# Altium PCB ESP-WROOM32.PcbDoc (part 1 of 2)
Units mil, origin at the board's own origin, x right, y up, seen from the top; angles counter-clockwise.
Board outline 3370 x 1400 mil, 2 copper layers (L1, L2); 42 components, 54 nets, 176 pads, 101 vias.
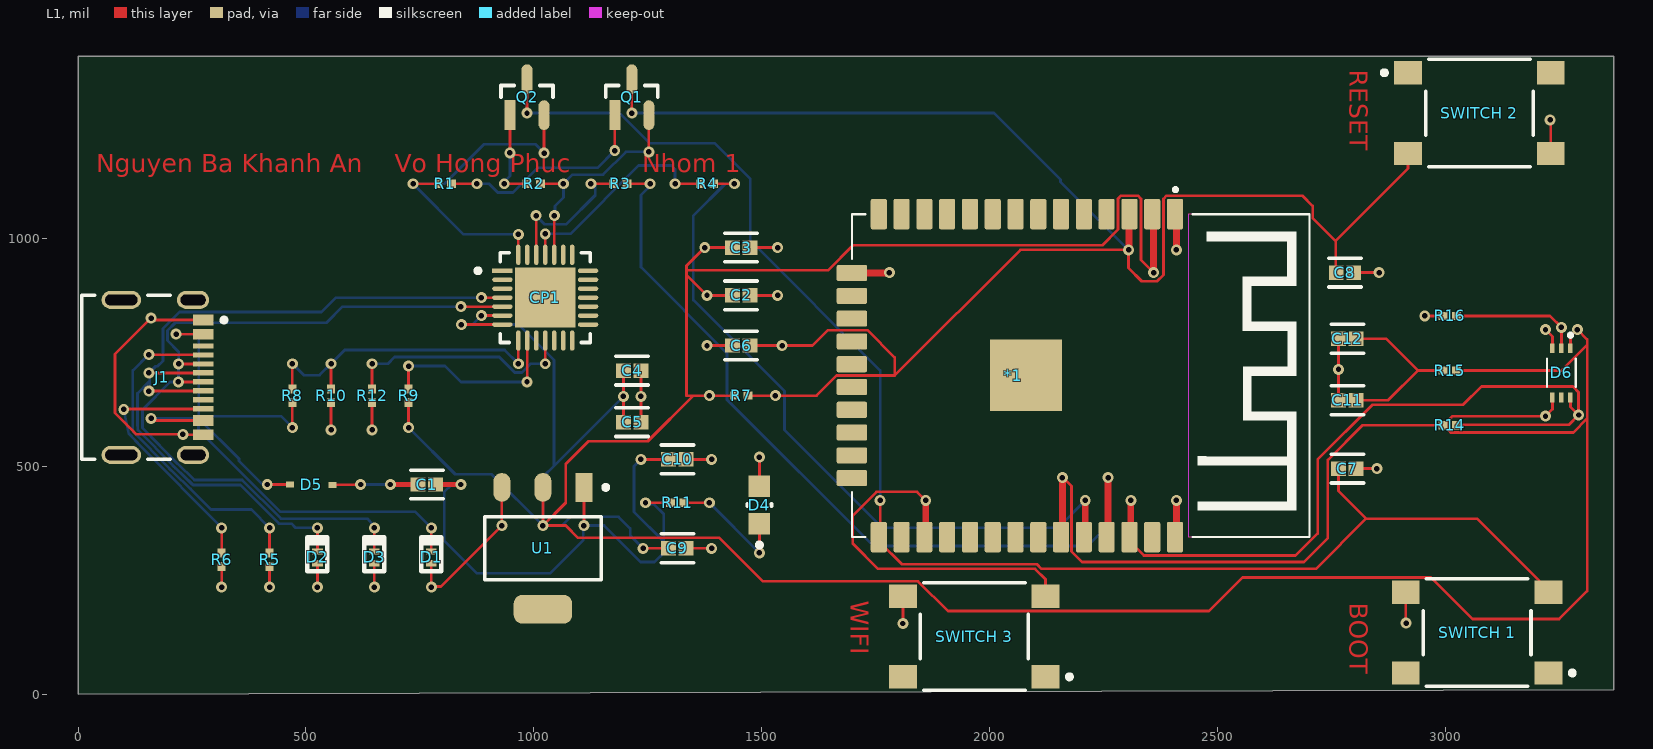
[diagram p0: L1 view]
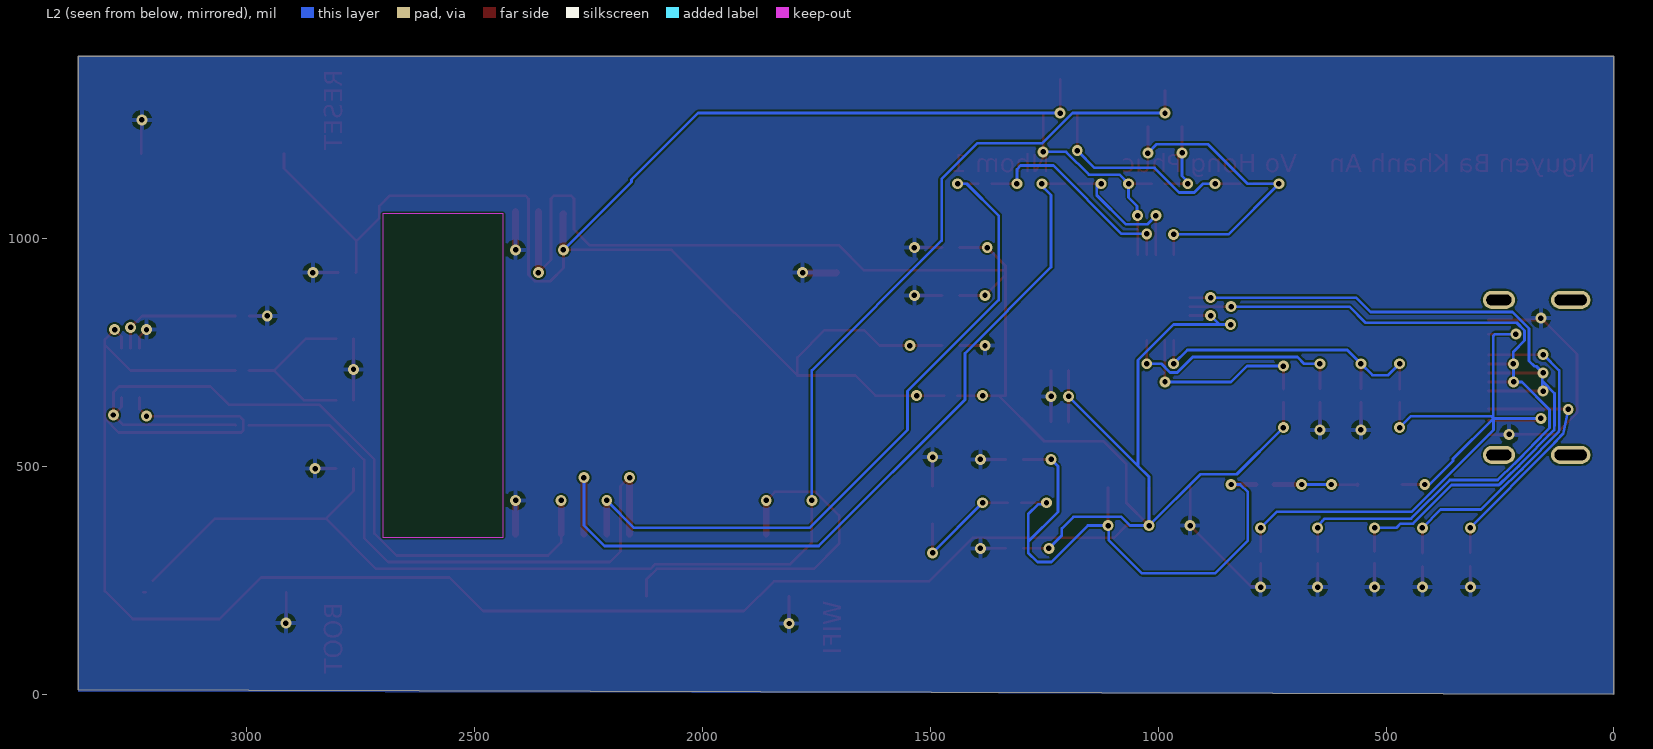
[diagram p1: L2 view, seen from below]
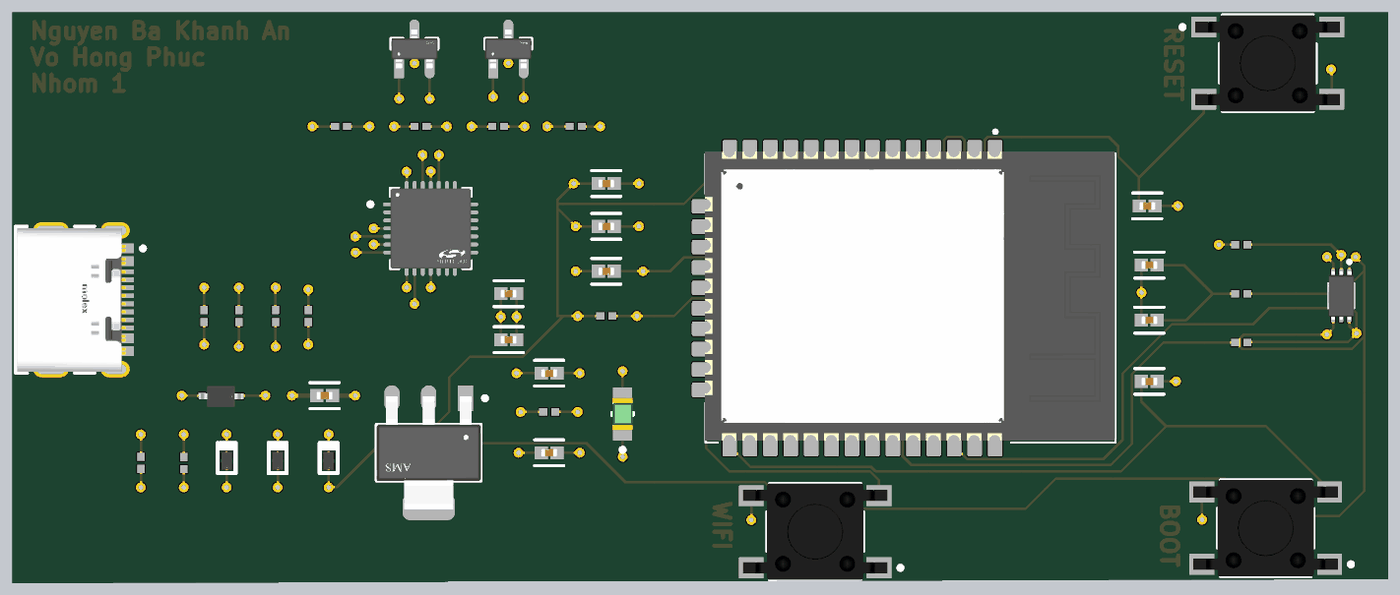
[diagram p2: 3D render of the assembled board from above, using the file's embedded part models]

## Layer stack, top to bottom
Top Solder: solder mask 0.4, Solder Resist, Dk 3.5
L1: signal copper 1.4
Dielectric 1: prepreg 12.6, PP-006, Dk 4.8
L2: signal copper 1.4
Bottom Solder: solder mask 0.4, Solder Resist, Dk 3.5

## Board outline
0,0 0,1400 3370,1400 3370,10

## Design rules (kind name [scope] priority, off if disabled: settings)
Clearance [All] p1: gap=4 ignorepadtopadclearanceinfootprint=FALSE except(2: SMDPad-SMDPad)
MinimumSolderMaskSliver [All] p1: minsoldermaskwidth=3
PlaneConnect [All] p1: planeconnectstyle=Direct reliefexpansion=20 reliefentries=4 reliefconductorwidth=10 reliefairgap=10
PolygonConnect [All] p1: connectstyle=Relief reliefconductorwidth=10 reliefentries=4 polygonreliefangle="90 Angle" airgapwidth=10
RoutingVias [All] p1: holewidth=12 width=24 viastyle="Through Hole" minholewidth=12 minwidth=24 maxholewidth=12 maxwidth=24
SilkToSolderMaskClearance [IsPad] p1: minsilkscreentomaskgap=4 clearancetoexposedcopper=TRUE
SolderMaskExpansion [All] p1: expansion=3 istentingtop=FALSE
SupplyNets "Schematic Supply Nets_4" [InNet('IO21')] p1: voltage=0.000
SupplyNets "Schematic Supply Nets_3" [InNet('GND')] p2: voltage=0.000
SupplyNets "Schematic Supply Nets_2" [InNet('EXT_5V')] p3: voltage=0.000
SupplyNets "Schematic Supply Nets" [InNet('VBUS')] p4: voltage=0.000
Width [All] p1: maxlimit=100 minlimit=6 preferedwidth=6 minimp=50.000000 maximp=50.000000 favimp=50.000000
27 further rules are at their usual default settings.

## Components (designator, comment, footprint, x,y, rotation, side; value= is the part's Value field where it differs from the comment)
*1 "ESP32-WROOM-32E-N4" MODULE_ESP-WROOM-32 2082,699 r270 top
C1 "0.1uF/50V(10%)" FP-GRM158-0_2-IPC_A 765,460 r0 top value=100nF
C2 "0.1uF/50V(10%)" FP-GRM158-0_2-IPC_A 1455,875 r180 top value=100nF
C3 "22uF/10V(20%)" FP-GRM158-0_2-IPC_A 1455,980 r180 top value=22µF
C4 "10uF/10V(20%)" FP-GRM158-0_2-IPC_A 1215.75,710 r180 top value=10µF
C5 "0.1uF/50V(10%)" FP-GRM158-0_2-IPC_A 1215.75,597 r180 top value=100nF
C6 "0.1uF/50V(10%)" FP-GRM158-0_2-IPC_A 1455,765 r0 top value=100nF
C7 "0.1uF/50V(10%)" FP-GRM158-0_2-IPC_A 2785,495 r180 top value=100nF
C8 "0.1uF/50V(10%)" FP-GRM158-0_2-IPC_A 2780,925 r180 top value=100nF
C9 "22uF/10V(20%)" FP-GRM158-0_2-IPC_A 1315,320 r180 top value=22µF
C10 "22uF/10V(20%)" FP-GRM158-0_2-IPC_A 1315,515 r180 top value=22µF
C11 "10uF/10V(20%)" FP-GRM158-0_2-IPC_A 2785,645 r0 top value=10µF
C12 "0.1uF/50V(10%)" FP-GRM158-0_2-IPC_A 2785,780 r0 top value=100nF
CP1 "CP2102N-A02-GQFN28" FP-CP2102N-A02-GQFN28-IPC_A 1025,870 r0 top
D1 "AQ3045-01ETG" PESD5V0U1BA,115 775,300 r270 top
D2 "AQ3045-01ETG" PESD5V0U1BA,115 525,300 r270 top
D3 "AQ3045-01ETG" PESD5V0U1BA,115 650,300 r270 top
D4 "LTST-C170GKT" FP-LTST-C170GKT-MFG 1495,415 r90 top
D5 "BAT760Q-7" BAT760Q-7 510,460 r0 top
D6 "BH1750" XDCR_BH1750FVI-TR 3255,705 r270 top
J1 "USB-C" FP-2171790001-MFG 140,695 r270 top
Q1 "SS8050-G" FP-SS8050-G-IPC_A 1215,1310 r90 top
Q2 "SS8050-G" FP-SS8050-G-IPC_A 985,1310 r90 top
R1 "10K(5%)" RESC1005X40X25LL05T10 805,1120 r0 top value=10kΩ
R2 "10K(5%)" RESC1005X40X25LL05T10 1000,1120 r180 top value=10kΩ
R3 "10K(5%)" RESC1005X40X25LL05T10 1190,1120 r180 top value=10kΩ
R4 "10K(5%)" RESC1005X40X25LL05T10 1380,1120 r180 top value=10kΩ
R5 "5.1K" RESC1005X40X25LL05T10 420,294.76 r90 top value=5.1kΩ
R6 "5.1K" RESC1005X40X25LL05T10 315,295.24 r90 top value=5.1kΩ
R7 "10K(5%)" RESC1005X40X25LL05T10 1455,655 r180 top value=10kΩ
R8 "22.1K(1%)" RESC1005X40X25LL05T10 470,655 r90 top value=22.1kΩ
R9 "2K(5%)" RESC1005X40X25LL05T10 725,655 r90 top value=2kΩ
R10 "47.5K(1%)" RESC1005X40X25LL05T10 555,655 r90 top value=47.5kΩ
R11 "10K(5%)" RESC1005X40X25LL05T10 1315,420 r180 top value=10kΩ
R12 "10K(5%)" RESC1005X40X25LL05T10 645,655 r90 top value=10kΩ
R14 "4.7KOHM" RESC1005X40X25LL05T10 3010,590 r0 top value=47kΩ
R15 "1kohm" RESC1005X40X25LL05T10 3010,710 r0 top value=1kΩ
R16 "1kohm" RESC1005X40X25LL05T10 3010,830 r0 top value=1kΩ
"SWITCH 1" "PTS645SL50SMTR92LFS" FP-PTS645SH50SMTR92LFS-MFG 3070,135 r180 top
"SWITCH 2" "PTS645SL50SMTR92LFS" FP-PTS645SH50SMTR92LFS-MFG 3075,1275 r0 top
"SWITCH 3" "PTS645SL50SMTR92LFS" FP-PTS645SH50SMTR92LFS-MFG 1966.5,126.42 r180 top
U1 "AMS1117-3.3" FP-AMS1117-IPC_A 1020,320 r270 top

## Footprints (in the part's own frame and the unit in brackets; to place one, negate y for a bottom-side part, rotate by r counter-clockwise, add the part's x,y. Pads: shape width x height; smd on the part's side, far side on the other; paste and mask are expansions set on the pad)
BAT760Q-7 [mm]
  rect 0.45x0.35 smd: 1(-1.143,0) 2(1.219,-0.025)
  body extent -1.32,-0.7 1.37,0.6, height 1.09
FP-2171790001-MFG [mm]
  rrect100% 1x1.8 hole 1.4 slot 0.6 at 0 deg paste-2539.97 mask+0: 1(-4.32,2.85) 2(4.32,2.85)
  rrect100% 1x2.2 hole 1.8 slot 0.6 at 0 deg paste-2539.97 mask+0: 3(-4.32,-1.15) 4(4.32,-1.15)
  rect 0.6x1.15 smd paste+0 mask+0: A1-B12(-3.2,3.425) A4-B9(-2.4,3.425) B1-A12(3.2,3.425) B4-A9(2.4,3.425)
  rect 0.3x1.15 smd paste+0 mask+0: A5(-1.25,3.425) A6(-0.25,3.425) A7(0.25,3.425) A8(1.25,3.425) B5(1.75,3.425) B6(0.75,3.425) B7(-0.75,3.425) B8(-1.75,3.425)
  silkscreen extent -4.57,-3.35 4.57,4.7, body extent -4.92,-3.45 4.92,4.1, height 0.25
FP-AMS1117-IPC_A [mm]
  rect 1.604x0.952 smd paste+0 mask+0: 1(-3.395,2.29)
  rrect100% 1.604x0.952 smd paste+0 mask+0: 2(-3.395,0) 3(-3.395,-2.29)
  rrect59% 1.604x3.262 smd paste+0 mask+0: 4(3.395,0)
  silkscreen extent -3.52,-3.25 1.75,3.63, body extent -4.7,-3.75 4.7,3.75, height 0.25
FP-CP2102N-A02-GQFN28-IPC_A [mm]
  rect 1.131x0.242 smd paste+0 mask+0: 1(-2.391,1.5)
  rrect100% 1.131x0.242 smd paste+0 mask+0: 2(-2.391,1) 3(-2.391,0.5) 4(-2.391,0) 5(-2.391,-0.5) 6(-2.391,-1) 7(-2.391,-1.5) 15(2.391,-1.5) 16(2.391,-1) 17(2.391,-0.5) 18(2.391,0) 19(2.391,0.5) 20(2.391,1) 21(2.391,1.5)
  rrect100% 0.242x1.131 smd paste+0 mask+0: 8(-1.5,-2.391) 9(-1,-2.391) 10(-0.5,-2.391) 11(0,-2.391) 12(0.5,-2.391) 13(1,-2.391) 14(1.5,-2.391) 22(1.5,2.391) 23(1,2.391) 24(0.5,2.391) 25(0,2.391) 26(-0.5,2.391) 27(-1,2.391) 28(-1.5,2.391)
  rect 3.35x3.35 smd paste-1000 mask+0: 29(0,0)
  silkscreen extent -3.88,-2.5 2.5,2.5, body extent -3.46,-3.46 3.46,3.46, height 0.25
FP-GRM158-0_2-IPC_A [mil]
  rect 32.6x31.74 smd paste+0 mask+0: 1(-19.25,0) 2(19.25,0)
  silkscreen extent -36,-32 36,32, body extent -43,-24 43,24, height 10
FP-LTST-C170GKT-MFG [mm]
  rect 1.2x1.2 smd paste+0 mask+0: 1(-1.05,0) 2(1.05,0)
  silkscreen extent -2.35,-0.67 0.08,0.67, body extent -1.75,-0.77 1.75,0.77, height 0.25
FP-PTS645SH50SMTR92LFS-MFG [mm]
  rect 1.55x1.3 smd paste+0 mask+0: 1(-3.975,2.25) 2(3.975,2.25) 3(-3.975,-2.25) 4(3.975,-2.25)
  silkscreen extent -5.43,-3 3,3, body extent -4.85,-3.1 4.85,3.1, height 0.25
FP-SS8050-G-IPC_A [mm]
  rect 1.657x0.612 smd paste+0 mask+0: 1(-1.001,0.95)
  rrect100% 1.657x0.612 smd paste+0 mask+0: 2(-1.001,-0.95) 3(1.001,0)
  silkscreen extent 0,-1.45 0.65,1.45, body extent -2.33,-1.95 2.33,1.95, height 0.25
MODULE_ESP-WROOM-32 [mm]
  rrect22% 1.7x0.9 smd: 1(-9,8.255) 2(-9,6.985) 3(-9,5.715) 4(-9,4.445) 5(-9,3.175) 6(-9,1.905) 7(-9,0.635) 8(-9,-0.635) 9(-9,-1.905) 10(-9,-3.175) 11(-9,-4.445) 12(-9,-5.715) 13(-9,-6.985) 14(-9,-8.255) 25(9,-8.255) 26(9,-6.985) 27(9,-5.715) 28(9,-4.445) 29(9,-3.175) 30(9,-1.905) 31(9,-0.635) 32(9,0.635) 33(9,1.905) 34(9,3.175) 35(9,4.445) 36(9,5.715) 37(9,6.985) 38(9,8.255)
  rect 4x4 smd: 1.1(-0.025,-0.051)
  rrect22% 0.9x1.7 smd: 15(-5.715,-9.755) 16(-4.445,-9.755) 17(-3.175,-9.755) 18(-1.905,-9.755) 19(-0.635,-9.755) 20(0.635,-9.755) 21(1.905,-9.755) 22(3.175,-9.755) 23(4.445,-9.755) 24(5.715,-9.755)
  Keep-Out Layer region: 9,9.026 -9.026,9.026 -9.026,15.75 9,15.75
  Keep-Out Layer region: 9,9.012 -9.012,9.012 -9.012,15.75 9,15.75
  silkscreen extent -10.46,-9.75 9,15.75, body extent -9.13,-9.78 8.87,15.72, height 3.25
PESD5V0U1BA,115 [mm]
  rect 0.35x0.6 smd: 1(-0.325,0) 2(0.325,0)
  silkscreen extent -1.12,-0.56 0.76,0.56, body extent -0.55,-0.33 0.55,0.33, height 0.56
RESC1005X40X25LL05T10 [mm] "Chip Resistor, 2-Leads, Body 1.00x0.50mm, IPC High Density"
  rect 0.5x0.45 smd: 1(-0.375,0) 2(0.375,0)
  body extent -0.53,-0.27 0.53,0.28, height 0.4
XDCR_BH1750FVI-TR [mm]
  rect 0.55x0.25 smd: 1(-1.375,0.5) 2(-1.375,0) 3(-1.375,-0.5) 4(1.375,-0.5) 5(1.375,0) 6(1.375,0.5)
  silkscreen extent -2.2,-0.8 0.78,0.8, body extent -1.5,-0.8 1.5,0.8, height 0.75

## Part data
*1: "RF TXRX MOD BT WIFI TH SMD", LCSC part number=C701341, Manufacturer="Espressif Systems", Max Operating Temperature=85°C, Max Supply Voltage=3.6V, Min Operating Temperature=-40°C, Min Supply Voltage=3V, Operating Supply Voltage=3.3V, Supplier Part Number=1965-ESP32-WROOM-32E-N4CT-ND, Category="System on Chip (SoC)", ComponentLink1Description=https://datasheet.octopart.com:443/ESP32-WROOM-32E-N4-Espressif-Systems-datasheet-182247776.pdf?src-supplier=IHS, ComponentLink1URL=https://datasheet.octopart.com:443/ESP32-WROOM-32E-N4-Espressif-Systems-datasheet-182247776.pdf?src-supplier=IHS, ComponentLink2Description=https://datasheet.octopart.com:443/ESP32-WROOM-32E-N4-Espressif-Systems-datasheet-188867343.pdf?src-supplier=TME, ComponentLink2URL=https://datasheet.octopart.com:443/ESP32-WROOM-32E-N4-Espressif-Systems-datasheet-188867343.pdf?src-supplier=TME, ComponentLink3Description=https://datasheet.octopart.com:443/ESP32-WROOM-32E-N4-Espressif-Systems-datasheet-165560559.pdf?src-supplier=TME, ComponentLink3URL=https://datasheet.octopart.com:443/ESP32-WROOM-32E-N4-Espressif-Systems-datasheet-165560559.pdf?src-supplier=TME, ComponentLink4Description=https://datasheet.octopart.com:443/ESP32-WROOM-32E-N4-Espressif-Systems-datasheet-151884363.pdf?src-supplier=Future+Electronics, ComponentLink4URL=https://datasheet.octopart.com:443/ESP32-WROOM-32E-N4-Espressif-Systems-datasheet-151884363.pdf?src-supplier=Future+Electronics, Height - Seated (Max)=3.25mm, Length=25.5mm, Manufacturer Part Number=ESP32-WROOM-32E-N4, Number of Terminals=38, Pricing="1=4.84, 10=4.189, 25=3.9612, 100=3.649, 250=3.46184 (USD)", RoHS=Compliant, Stock=16186, Supplier=DigiKey, Terminal Pitch=1.27mm, Width=18mm
C1 C2 C5 C6 C7 C8 C12: library part CL05B104KB5NNWC, "CAP CER 0.1UF 50V X7R 0402", Dielectric Material=Ceramic, LCSC part number=C7229230, Manufacturer="Samsung Electro-Mechanics", Max Operating Temperature=125°C, Min Operating Temperature=-55°C, Supplier Part Number=1276-CL05B104KB5NNWCCT-ND, Voltage Rating (DC)=50V, Category="Ceramic Capacitors", China RoHS=Compliant, ComponentLink1Description=https://datasheet.octopart.com:443/CL05B104KB5NNWC-Samsung-Electro-Mechanics-datasheet-182018729.pdf?src-supplier=IHS, ComponentLink1URL=https://datasheet.octopart.com:443/CL05B104KB5NNWC-Samsung-Electro-Mechanics-datasheet-182018729.pdf?src-supplier=IHS, Lifecycle Status=Production, Manufacturer Part Number=CL05B104KB5NNWC, Mounting Technology="Surface Mount", Number of Terminals=2, Pricing="1=0.1, 10=0.054, 50=0.037, 100=0.0319, 500=0.02338, 1000=0.02075, 2500=0.018, 5000=0.01634 (USD)", REACH SVHC=Yes, RoHS=Compliant, Schedule B="8532240020, 8532240020|8532240020|8532240020|8532240020|8532240020", Stock=89724, Supplier=DigiKey
C3 C9 C10: library part GRM158R61A226ME15D, "CAP CER 22UF 10V X5R 0402", Case/Package=0402, Dielectric=X5R, Dielectric Material=Ceramic, LCSC part number=C3845593, Manufacturer=Murata, Manufacturer Lifecycle Status="IN PRODUCTION", Max Operating Temperature=85°C, Min Operating Temperature=-55°C, Supplier Part Number=490-GRM158R61A226ME15DCT-ND, Tolerance=20%, Voltage Rating=10V, Category="Ceramic Capacitors", ComponentLink1Description=https://datasheet.octopart.com:443/GRM158R61A226ME15D-Murata-datasheet-165579666.pdf?src-supplier=TME, ComponentLink1URL=https://datasheet.octopart.com:443/GRM158R61A226ME15D-Murata-datasheet-165579666.pdf?src-supplier=TME, ComponentLink2Description=https://datasheet.octopart.com/GRM158R61A226ME15D-Murata-datasheet-12515295.pdf, ComponentLink2URL=https://datasheet.octopart.com/GRM158R61A226ME15D-Murata-datasheet-12515295.pdf, ComponentLink3Description=https://datasheet.octopart.com/GRM158R61A226ME15D-Murata-datasheet-12510076.pdf, ComponentLink3URL=https://datasheet.octopart.com/GRM158R61A226ME15D-Murata-datasheet-12510076.pdf, ComponentLink4Description=https://datasheet.octopart.com/GRM158R61A226ME15D-Murata-datasheet-11978611.pdf, ComponentLink4URL=https://datasheet.octopart.com/GRM158R61A226ME15D-Murata-datasheet-11978611.pdf, ComponentLink5Description=https://datasheet.octopart.com/GRM158R61A226ME15D-Murata-datasheet-10025737.pdf, ComponentLink5URL=https://datasheet.octopart.com/GRM158R61A226ME15D-Murata-datasheet-10025737.pdf, ComponentLink6Description=https://datasheet.octopart.com/GRM158R61A226ME15D-Murata-datasheet-8819587.pdf, ComponentLink6URL=https://datasheet.octopart.com/GRM158R61A226ME15D-Murata-datasheet-8819587.pdf, ComponentLink7Description=http://sigma.octopart.com:80/reach_statement/Murata-company-16.pdf?src-supplier=Compliance+Statements, ComponentLink7URL=http://sigma.octopart.com:80/reach_statement/Murata-company-16.pdf?src-supplier=Compliance+Statements, Height=800µm, Length=1mm, Lifecycle Status=Production, Manufacturer Part Number=GRM158R61A226ME15D, Material=Ceramic, Mounting Technology="Surface Mount", Number of Terminals=2, Pricing="1=0.41, 10=0.247, 50=0.1828, 100=0.1632, 500=0.1301, 1000=0.1199, 2500=0.10912 (USD)", REACH SVHC=Yes, RoHS=Compliant, Stock=340623, Supplier=DigiKey, Thickness=800µm, Voltage Rating (DC)=10V, Width=500µm
C4 C11: library part CC0402MRX5R6BB106, "CAP CER 10UF 10V X5R 0402", Case/Package=0402, Dielectric=X5R, Dielectric Material=Ceramic, LCSC part number=C962143, Manufacturer="Yageo Group", Max Operating Temperature=85°C, Min Operating Temperature=-55°C, Supplier Part Number=13-CC0402MRX5R6BB106CT-ND, Voltage Rating (DC)=10V, Category="Ceramic Capacitors", China RoHS=Compliant, ComponentLink1Description=https://datasheet.octopart.com:443/CC0402MRX5R6BB106-Yageo-datasheet-170350636.pdf?src-supplier=IHS, ComponentLink1URL=https://datasheet.octopart.com:443/CC0402MRX5R6BB106-Yageo-datasheet-170350636.pdf?src-supplier=IHS, ComponentLink2Description=https://datasheet.octopart.com:443/CC0402MRX5R6BB106-Yageo-Group-datasheet-189192896.pdf?src-supplier=TME, ComponentLink2URL=https://datasheet.octopart.com:443/CC0402MRX5R6BB106-Yageo-Group-datasheet-189192896.pdf?src-supplier=TME, ComponentLink3Description=https://datasheet.octopart.com:443/CC0402MRX5R6BB106-Yageo-datasheet-182029486.pdf?src-supplier=Newark, ComponentLink3URL=https://datasheet.octopart.com:443/CC0402MRX5R6BB106-Yageo-datasheet-182029486.pdf?src-supplier=Newark, ComponentLink4Description=https://datasheet.octopart.com:443/CC0402MRX5R6BB106-Yageo-datasheet-158238148.pdf?src-supplier=Newark, ComponentLink4URL=https://datasheet.octopart.com:443/CC0402MRX5R6BB106-Yageo-datasheet-158238148.pdf?src-supplier=Newark, ComponentLink5Description=https://datasheet.octopart.com/CC0402MRX5R6BB106-Yageo-datasheet-86397281.pdf, ComponentLink5URL=https://datasheet.octopart.com/CC0402MRX5R6BB106-Yageo-datasheet-86397281.pdf, ComponentLink6Description=https://datasheet.octopart.com:443/CC0402MRX5R6BB106-Yageo-datasheet-175963154.pdf?src-supplier=element14+APAC, ComponentLink6URL=https://datasheet.octopart.com:443/CC0402MRX5R6BB106-Yageo-datasheet-175963154.pdf?src-supplier=element14+APAC, ComponentLink7Description=https://datasheet.octopart.com:443/CC0402MRX5R6BB106-Yageo-Group-datasheet-145016144.pdf?src-supplier=ODG+(Origin+Data+Global), ComponentLink7URL=https://datasheet.octopart.com:443/CC0402MRX5R6BB106-Yageo-Group-datasheet-145016144.pdf?src-supplier=ODG+(Origin+Data+Global), ComponentLink8Description=https://datasheet.octopart.com:443/CC0402MRX5R6BB106-Yageo-datasheet-62067349.pdf?src-supplier=Future+Electronics, ComponentLink8URL=https://datasheet.octopart.com:443/CC0402MRX5R6BB106-Yageo-datasheet-62067349.pdf?src-supplier=Future+Electronics, ComponentLink9Description=http://sigma.octopart.com:80/conflict_mineral_statement/Yageo-company-3.pdf?src-supplier=Compliance+Statements, ComponentLink9URL=http://sigma.octopart.com:80/conflict_mineral_statement/Yageo-company-3.pdf?src-supplier=Compliance+Statements, ComponentLink10Description=http://sigma.octopart.com:80/rohs_statement/Yageo-company-2.pdf?src-supplier=Compliance+Statements, ComponentLink10URL=http://sigma.octopart.com:80/rohs_statement/Yageo-company-2.pdf?src-supplier=Compliance+Statements, Halogen Free="Halogen Free", Height=500µm, Lead Free="Lead Free", Length=1mm, Lifecycle Status=Production, Manufacturer Part Number=CC0402MRX5R6BB106, Mounting Technology="Surface Mount", Number of Terminals=2, Pricing="1=0.21, 10=0.121, 50=0.0866, 100=0.076, 500=0.05824, 1000=0.05277, 2500=0.04701, 5000=0.04354 (USD)", REACH SVHC=Yes, RoHS=Compliant, Stock=59624, Supplier=DigiKey, Width=500µm
CP1: "USB Bridge, USB to UART USB 2.0 UART Interface 28-QFN (5x5)", Ambient Temperature Range High=85°C, LCSC part number=C964632, Manufacturer="Silicon Labs", Manufacturer Lifecycle Status="FULL PRODUCTION", Max Junction Temperature (Tj)=105°C, Max Supply Voltage=3.6V, Min Operating Temperature=-40°C, Min Supply Voltage=3V, Operating Supply Voltage=3.3V, Supplier Part Number=336-5889-ND, Category="USB Interface ICs", China RoHS=Compliant, ComponentLink1Description=https://datasheet.octopart.com:443/CP2102N-A02-GQFN28-Silicon-Labs-datasheet-138898368.pdf?src-supplier=Augswan, ComponentLink1URL=https://datasheet.octopart.com:443/CP2102N-A02-GQFN28-Silicon-Labs-datasheet-138898368.pdf?src-supplier=Augswan, ComponentLink2Description=https://datasheet.octopart.com:443/CP2102N-A02-GQFN28-Silicon-Labs-datasheet-166051788.pdf?src-supplier=IHS, ComponentLink2URL=https://datasheet.octopart.com:443/CP2102N-A02-GQFN28-Silicon-Labs-datasheet-166051788.pdf?src-supplier=IHS, Data Rate=1.5Mbps, Height=800µm, Height - Seated (Max)=800µm, Interface=UART, Length=5mm, Lifecycle Status=Production, Manufacturer Part Number=CP2102N-A02-GQFN28, Max Operating Temperature=85°C, Number of Digital IO=7, Number of Ports=1, Number of Terminals=28, Pricing="1=4.32, 10=3.275, 73=2.78205, 146=2.66534, 292=2.56928, 511=2.50429, 1022=2.43673, 2555=2.36542 (USD)", REACH SVHC=Yes, RoHS=Compliant, Stock=1307, Supplier=DigiKey, Terminal Pitch=500µm, USB Standard="USB 2.0", Width=5mm
D1 D2 D3: "TVS DIODE 5.3VWM 12VC SOD882", Breakdown Voltage=7.8V, Clamping Voltage=12V, LCSC part number=C3710326, Leakage Current=100nA, Manufacturer=Littelfuse, Max Breakdown Voltage=9V, Max Operating Temperature=150°C, Min Breakdown Voltage=6.8V, Min Operating Temperature=-40°C, Operating Supply Voltage=5.3V, Peak Pulse Power=40W, Category="TVS Diodes", ComponentLink1Description=https://datasheet.octopart.com:443/AQ3045-01ETG-Littelfuse-datasheet-180606588.pdf?src-supplier=IHS, ComponentLink1URL=https://datasheet.octopart.com:443/AQ3045-01ETG-Littelfuse-datasheet-180606588.pdf?src-supplier=IHS, ComponentLink2Description=https://datasheet.octopart.com:443/AQ3045-01ETG-Littelfuse-datasheet-183003566.pdf?src-supplier=JRH+Electronics, ComponentLink2URL=https://datasheet.octopart.com:443/AQ3045-01ETG-Littelfuse-datasheet-183003566.pdf?src-supplier=JRH+Electronics, ComponentLink3Description=https://datasheet.octopart.com:443/AQ3045-01ETG-Littelfuse-datasheet-140480283.pdf?src-supplier=ODG+(Origin+Data+Global), ComponentLink3URL=https://datasheet.octopart.com:443/AQ3045-01ETG-Littelfuse-datasheet-140480283.pdf?src-supplier=ODG+(Origin+Data+Global), ComponentLink4Description=https://datasheet.octopart.com:443/AQ3045-01ETG-Littelfuse-datasheet-101609968.pdf?src-supplier=Farnell, ComponentLink4URL=https://datasheet.octopart.com:443/AQ3045-01ETG-Littelfuse-datasheet-101609968.pdf?src-supplier=Farnell, ComponentLink5Description=https://datasheet.octopart.com:443/AQ3045-01ETG-Littelfuse-datasheet-170904929.pdf?src-supplier=Future+Electronics, ComponentLink5URL=https://datasheet.octopart.com:443/AQ3045-01ETG-Littelfuse-datasheet-170904929.pdf?src-supplier=Future+Electronics, Lifecycle Status=Production, Manufacturer Part Number=AQ3045-01ETG, Mounting Technology="Surface Mount", Number of Channels=1, Number of Elements=1, Number of Terminals=2, Packaging="Cut Tape", Peak Reverse Current=100nA, Polarity=Bidirectional, Pricing="10000=0.1196 (USD)", REACH SVHC=Yes, Reverse Standoff Voltage=5.3V, RoHS=Compliant, Stock=250000, Supplier="Arrow Electronics", Supplier Part Number=AQ3045-01ETG
D4: "LED GREEN CLEAR SMD", Case Code (Imperial)=0805, Case Code (Metric)=2012, Color=Green, Current=4A, Forward Current=30mA, Forward Voltage=2.6V, LCSC part number=C125090, Lens Color="Clear, Colorless", Manufacturer=Lite-On, Max Operating Temperature=85°C, Min Operating Temperature=-55°C, Power Dissipation=100mW, Reverse Voltage=5V, Supplier Part Number=160-1179-1-ND, Test Current=10mA, Case/Package=0805, Category=LEDs, China RoHS=Compliant, ComponentLink1Description=https://datasheet.octopart.com:443/LTST-C170GKT-Lite-On-datasheet-180605137.pdf?src-supplier=IHS, ComponentLink1URL=https://datasheet.octopart.com:443/LTST-C170GKT-Lite-On-datasheet-180605137.pdf?src-supplier=IHS, ComponentLink2Description=https://datasheet.octopart.com:443/LTST-C170GKT-Lite-On-datasheet-141439001.pdf?src-supplier=Upverter, ComponentLink2URL=https://datasheet.octopart.com:443/LTST-C170GKT-Lite-On-datasheet-141439001.pdf?src-supplier=Upverter, ComponentLink3Description=https://datasheet.octopart.com:443/LTST-C170GKT-Lite-On-datasheet-159307.pdf?src-supplier=Arrow+Electronics, ComponentLink3URL=https://datasheet.octopart.com:443/LTST-C170GKT-Lite-On-datasheet-159307.pdf?src-supplier=Arrow+Electronics, ComponentLink4Description=https://datasheet.octopart.com:443/LTST-C170GKT-Lite-On-datasheet-8330158.pdf?src-supplier=TME, ComponentLink4URL=https://datasheet.octopart.com:443/LTST-C170GKT-Lite-On-datasheet-8330158.pdf?src-supplier=TME, ComponentLink5Description=https://datasheet.octopart.com:443/LTST-C170GKT-Lite-On-datasheet-26684672.pdf?src-supplier=Future+Electronics, ComponentLink5URL=https://datasheet.octopart.com:443/LTST-C170GKT-Lite-On-datasheet-26684672.pdf?src-supplier=Future+Electronics, ComponentLink6Description=https://datasheet.octopart.com:443/LTST-C170GKT-Lite-On-datasheet-59241.pdf?src-supplier=DigiKey, ComponentLink6URL=https://datasheet.octopart.com:443/LTST-C170GKT-Lite-On-datasheet-59241.pdf?src-supplier=DigiKey, ComponentLink7Description=https://datasheet.octopart.com:443/LTST-C170GKT-Lite-On-datasheet-14174986.pdf?src-supplier=iiiC, ComponentLink7URL=https://datasheet.octopart.com:443/LTST-C170GKT-Lite-On-datasheet-14174986.pdf?src-supplier=iiiC, Depth=1.25mm, Dominant Wavelength=569nm, Height=1.1mm, Illumination Color=Green, Lead Free="Lead Free", Length=2mm, Lens Transparency=Clear, Lifecycle Status=Production, Luminous Intensity=6mcd, Manufacturer Part Number=LTST-C170GKT, Mounting Technology="Surface Mount", Number of Circuits=1, Number of Elements=1, Number of LEDs=1, Number of Terminals=2, Packaging="Tape and Reel", Peak Wavelength=565nm, Pins=2, Power Rating=100mW, Pricing="1=0.1, 10=0.066, 100=0.0453, 500=0.03552, 1000=0.03224 (USD)", Radiation Hardening=No, REACH SVHC=Yes, RoHS=Compliant, Schedule B="8541402000, 8541402000|8541402000|8541402000|8541402000|8541402000|8541402000|8541402000|8541402000|8541402000|8541402000|8541402000|8541402000|8541402000|8541402000|8541402000|8541402000|8541402000|8541402000|8541402000|8541402000|8541402000|8541402000|8541402000|85", Shape=Rectangular, Stock=1226220, Supplier=DigiKey, Terminal Pitch=2.1mm, Viewing Angle=130°, Voltage=5V, Wavelength=569nm, Width=1.25mm
D5: "DIODE SCHOTTKY 30V 1A SOD323", Average Rectified Current=1A, LCSC part number=C3759252, Manufacturer="Diodes Inc.", Max Forward Surge Current (Ifsm)=5.5A, Max Operating Temperature=150°C, Max Power Dissipation=235mW, Max Reverse Voltage (DC)=30V, Min Operating Temperature=-65°C, Supplier Part Number=BAT760Q-7DICT-ND, Category="Schottky Diodes", China RoHS=Compliant, ComponentLink1Description=https://datasheet.octopart.com:443/BAT760Q-7-Diodes-Inc.-datasheet-151209907.pdf?src-supplier=IHS, ComponentLink1URL=https://datasheet.octopart.com:443/BAT760Q-7-Diodes-Inc.-datasheet-151209907.pdf?src-supplier=IHS, ComponentLink2Description=https://sigma.octopart.com:443/138810740/technical_drawing/Diodes-Inc.-BAT760Q-7.pdf?src-supplier=Diodes+Inc+SCT, ComponentLink2URL=https://sigma.octopart.com:443/138810740/technical_drawing/Diodes-Inc.-BAT760Q-7.pdf?src-supplier=Diodes+Inc+SCT, Lifecycle Status=Production, Manufacturer Part Number=BAT760Q-7, Max Output current=1A, Mounting Technology="Surface Mount", Number of Elements=1, Number of Terminals=2, Pricing="1=0.3, 10=0.205, 100=0.1688, 500=0.12602, 1000=0.11219 (USD)", REACH SVHC=Yes, Reverse Standoff Voltage=30V, RoHS=Compliant, Schedule B="8541100080, 8541100080|8541100080|8541100080|8541100080|8541100080", Stock=16229, Supplier=DigiKey
D6: library part BH1750FVI-TR, "SENSOR OPT 560NM AMBIENT 6WSOF", Case/Package=SMD/SMT, Clock Frequency=400kHz, LCSC part number=C78960, Manufacturer=ROHM, Max Operating Temperature=85°C, Max Power Dissipation=260mW, Max Supply Voltage=3.6V, Min Operating Temperature=-40°C, Min Supply Voltage=2.4V, Operating Supply Current=120µA, Operating Supply Voltage=3V, Supplier Part Number=BH1750FVICT-ND, Category="Optical Sensors", ComponentLink1Description=https://sigma.octopart.com:443/169791153/technical_drawing/ROHM-BH1750FVI-TR.pdf?src-supplier=Upverter, ComponentLink1URL=https://sigma.octopart.com:443/169791153/technical_drawing/ROHM-BH1750FVI-TR.pdf?src-supplier=Upverter, ComponentLink2Description=https://datasheet.octopart.com:443/BH1750FVI-TR-Rohm-datasheet-141422541.pdf?src-supplier=Upverter, ComponentLink2URL=https://datasheet.octopart.com:443/BH1750FVI-TR-Rohm-datasheet-141422541.pdf?src-supplier=Upverter, ComponentLink3Description=https://datasheet.octopart.com:443/BH1750FVI-TR-ROHM-datasheet-169791149.pdf?src-supplier=Upverter, ComponentLink3URL=https://datasheet.octopart.com:443/BH1750FVI-TR-ROHM-datasheet-169791149.pdf?src-supplier=Upverter, ComponentLink4Description=https://datasheet.octopart.com:443/BH1750FVI-TR-Rohm-datasheet-25365051.pdf?src-supplier=Newark, ComponentLink4URL=https://datasheet.octopart.com:443/BH1750FVI-TR-Rohm-datasheet-25365051.pdf?src-supplier=Newark, ComponentLink5Description=https://datasheet.octopart.com:443/BH1750FVI-TR-Rohm-datasheet-8331172.pdf?src-supplier=_legacy+Avnet, ComponentLink5URL=https://datasheet.octopart.com:443/BH1750FVI-TR-Rohm-datasheet-8331172.pdf?src-supplier=_legacy+Avnet, ComponentLink6Description=https://datasheet.octopart.com:443/BH1750FVI-TR-Rohm-datasheet-145014626.pdf?src-supplier=Future+Electronics, ComponentLink6URL=https://datasheet.octopart.com:443/BH1750FVI-TR-Rohm-datasheet-145014626.pdf?src-supplier=Future+Electronics, ComponentLink7Description=https://datasheet.octopart.com:443/BH1750FVI-TR-Rohm-datasheet-14434783.pdf?src-supplier=Factory+Futures, ComponentLink7URL=https://datasheet.octopart.com:443/BH1750FVI-TR-Rohm-datasheet-14434783.pdf?src-supplier=Factory+Futures, Contact Plating="Copper, Tin", Height=750µm, Height - Seated (Max)=750µm, Interface="I2C, Serial", Lead Free="Lead Free", Length=2.6mm, Lifecycle Status=Obsolete, Manufacturer Part Number=BH1750FVI-TR, Mounting Technology="Surface Mount", Number of Circuits=1, Number of Terminals=6, Output Type="Digital, I2C", Pins=6, Pricing="1=3.29, 5=2.934, 10=2.804, 25=2.648, 50=2.542, 100=2.4447, 500=2.24896, 1000=2.18484 (USD)", Radiation Hardening=No, REACH SVHC=Yes, RoHS=Compliant, Schedule B=8541409500, Sensing Method=Optical, Stock=3509, Supplier=DigiKey, Terminal Pitch=500µm, Type="Integrated Circuit (IC)", Wavelength=560nm, Width=1.6mm
J1: library part 2171790001, "CONN RCP USB2.0 TYP C 24P SMD RA", Contact Resistance=50mΩ, Current Rating=1.25A, Dielectric Material=Polyamide, Insulation Resistance=100MΩ, LCSC part number=C3197684, Manufacturer=Molex, Manufacturer Part Number=217179-0001, Max Operating Temperature=85°C, Min Operating Temperature=-40°C, Supplier Part Number=900-2171790001CT-ND, Voltage Rating=30V, Category="USB Connectors", ComponentLink1Description=https://datasheet.octopart.com:443/217179-0001-Molex-datasheet-158871109.pdf?src-supplier=ODG+(Origin+Data+Global), ComponentLink1URL=https://datasheet.octopart.com:443/217179-0001-Molex-datasheet-158871109.pdf?src-supplier=ODG+(Origin+Data+Global), ComponentLink2Description=https://sigma.octopart.com:443/158871110/technical_drawing/Molex-217179-0001.pdf?src-supplier=Upverter, ComponentLink2URL=https://sigma.octopart.com:443/158871110/technical_drawing/Molex-217179-0001.pdf?src-supplier=Upverter, ComponentLink3Description=https://datasheet.octopart.com:443/217179-0001-Molex-datasheet-164573281.pdf?src-supplier=RS+(Formerly+Allied+Electronics), ComponentLink3URL=https://datasheet.octopart.com:443/217179-0001-Molex-datasheet-164573281.pdf?src-supplier=RS+(Formerly+Allied+Electronics), ComponentLink4Description=http://sigma.octopart.com:80/conflict_mineral_statement/Molex-company-72.pdf?src-supplier=Compliance+Statements, ComponentLink4URL=http://sigma.octopart.com:80/conflict_mineral_statement/Molex-company-72.pdf?src-supplier=Compliance+Statements, ComponentLink5Description=http://sigma.octopart.com:80/rohs_statement/Molex-company-73.pdf?src-supplier=Compliance+Statements, ComponentLink5URL=http://sigma.octopart.com:80/rohs_statement/Molex-company-73.pdf?src-supplier=Compliance+Statements, ComponentLink6Description=http://sigma.octopart.com:80/reach_statement/Molex-company-74.pdf?src-supplier=Compliance+Statements, ComponentLink6URL=http://sigma.octopart.com:80/reach_statement/Molex-company-74.pdf?src-supplier=Compliance+Statements, Contact Gender=Female, Contact Material="Gold, Nickel", Gender=Receptacle, Height=3.36mm, Lifecycle Status=Production, Number of Contacts=16, Number of Ports=1, Number of Rows=1, Pins=16, Pricing="1=0.83, 10=0.704, 25=0.6596, 50=0.628, 100=0.598, 250=0.56052, 500=0.53374 (USD)", REACH SVHC=Yes, RoHS=Compliant, Shell Finish=Nickel, Shell Material="Stainless Steel", Stock=5295, Supplier=DigiKey, Terminal Pitch=500µm, USB Standard="USB 2.0"
Q1 Q2: "TRANS NPN 25V 1.5A SOT-23-3", Case/Package=TO-236-3, Collector Base Voltage (VCBO)=40V, Collector Emitter Breakdown Voltage=25V, Collector Emitter Saturation Voltage=500mV, Emitter Base Voltage (VEBO)=5V, LCSC part number=C164886, Manufacturer=Comchip, Max Collector Current=1.5A, Max Junction Temperature (Tj)=150°C, Max Power Dissipation=300mW, Supplier Part Number=641-1790-1-ND, Transition Frequency=100MHz, Category=BJTs, Collector Emitter Voltage (VCEO)=25V, ComponentLink1Description=https://datasheet.octopart.com:443/SS8050-G-Comchip-datasheet-180131983.pdf?src-supplier=IHS, ComponentLink1URL=https://datasheet.octopart.com:443/SS8050-G-Comchip-datasheet-180131983.pdf?src-supplier=IHS, ComponentLink2Description=https://datasheet.octopart.com:443/SS8050-G-Comchip-datasheet-155422643.pdf?src-supplier=Upverter, ComponentLink2URL=https://datasheet.octopart.com:443/SS8050-G-Comchip-datasheet-155422643.pdf?src-supplier=Upverter, ComponentLink3Description=https://datasheet.octopart.com:443/SS8050-G-Comchip-datasheet-189767092.pdf?src-supplier=ODG+(Origin+Data+Global), ComponentLink3URL=https://datasheet.octopart.com:443/SS8050-G-Comchip-datasheet-189767092.pdf?src-supplier=ODG+(Origin+Data+Global), Height=1.15mm, hFE Min=40, Lifecycle Status=Production, Manufacturer Part Number=SS8050-G, Max Breakdown Voltage=25V, Max Operating Temperature=150°C, Mounting Technology="Surface Mount", Number of Elements=1, Number of Terminals=3, Power Dissipation=300mW, Pricing="1=0.24, 10=0.148, 100=0.0921, 500=0.06754, 1000=0.05958 (USD)", REACH SVHC=Yes, RoHS=Compliant, Schedule B=8541100070|8541100070|8541100070|8541100070|8541100070, Stock=59487, Supplier=DigiKey
R1 R2 R3 R4 R7 R11 R12: library part RC0402JR-0710KL, "RES 10K OHM 5% 1/16W 0402", Case Code (Imperial)=0402, LCSC part number=C60489, Manufacturer="Yageo Group", Max Operating Temperature=155°C, Max Power Dissipation=63mW, Min Operating Temperature=-55°C, Power Dissipation=62.5mW, Supplier Part Number=311-10KJRCT-ND, Temperature Coefficient=100ppm/°C, Tolerance=5%, Voltage Rating=50V, Case/Package=0402, Category="Chip SMD Resistors", China RoHS=Non-Compliant, ComponentLink1Description=https://datasheet.octopart.com:443/RC0402JR-0710KL-Yageo-datasheet-175887523.pdf?src-supplier=IHS, ComponentLink1URL=https://datasheet.octopart.com:443/RC0402JR-0710KL-Yageo-datasheet-175887523.pdf?src-supplier=IHS, ComponentLink2Description=https://datasheet.octopart.com:443/RC0402JR-0710KL-Yageo-datasheet-10408619.pdf?src-supplier=Newark, ComponentLink2URL=https://datasheet.octopart.com:443/RC0402JR-0710KL-Yageo-datasheet-10408619.pdf?src-supplier=Newark, ComponentLink3Description=https://datasheet.octopart.com:443/RC0402JR-0710KL-Yageo-datasheet-505231.pdf?src-supplier=Newark, ComponentLink3URL=https://datasheet.octopart.com:443/RC0402JR-0710KL-Yageo-datasheet-505231.pdf?src-supplier=Newark, ComponentLink4Description=https://datasheet.octopart.com:443/RC0402JR-0710KL-Yageo-datasheet-141265859.pdf?src-supplier=Upverter, ComponentLink4URL=https://datasheet.octopart.com:443/RC0402JR-0710KL-Yageo-datasheet-141265859.pdf?src-supplier=Upverter, ComponentLink5Description=https://sigma.octopart.com:443/138820526/technical_drawing/Yageo-RC0402JR-0710KL.pdf?src-supplier=Upverter, ComponentLink5URL=https://sigma.octopart.com:443/138820526/technical_drawing/Yageo-RC0402JR-0710KL.pdf?src-supplier=Upverter, ComponentLink6Description=https://datasheet.octopart.com:443/RC0402JR-0710KL-Yageo-datasheet-62067350.pdf?src-supplier=Farnell, ComponentLink6URL=https://datasheet.octopart.com:443/RC0402JR-0710KL-Yageo-datasheet-62067350.pdf?src-supplier=Farnell, ComponentLink7Description=https://datasheet.octopart.com:443/RC0402JR-0710KL-Yageo-datasheet-12531192.pdf?src-supplier=Seeed+Studio, ComponentLink7URL=https://datasheet.octopart.com:443/RC0402JR-0710KL-Yageo-datasheet-12531192.pdf?src-supplier=Seeed+Studio, ComponentLink8Description=https://datasheet.octopart.com:443/RC0402JR-0710KL-Yageo-datasheet-8324527.pdf?src-supplier=TME, ComponentLink8URL=https://datasheet.octopart.com:443/RC0402JR-0710KL-Yageo-datasheet-8324527.pdf?src-supplier=TME, ComponentLink9Description=https://datasheet.octopart.com:443/RC0402JR-0710KL-Yageo-datasheet-164759695.pdf?src-supplier=Future+Electronics, ComponentLink9URL=https://datasheet.octopart.com:443/RC0402JR-0710KL-Yageo-datasheet-164759695.pdf?src-supplier=Future+Electronics, ComponentLink10Description=https://datasheet.octopart.com:443/RC0402JR-0710KL-Yageo-datasheet-137700087.pdf?src-supplier=Future+Electronics, ComponentLink10URL=https://datasheet.octopart.com:443/RC0402JR-0710KL-Yageo-datasheet-137700087.pdf?src-supplier=Future+Electronics, ComponentLink11Description=https://datasheet.octopart.com/RC0402JR-0710KL-Yageo-datasheet-73766026.pdf, ComponentLink11URL=https://datasheet.octopart.com/RC0402JR-0710KL-Yageo-datasheet-73766026.pdf, ComponentLink12Description=https://datasheet.octopart.com:443/RC0402JR-0710KL-Yageo-datasheet-8329306.pdf?src-supplier=element14, ComponentLink12URL=https://datasheet.octopart.com:443/RC0402JR-0710KL-Yageo-datasheet-8329306.pdf?src-supplier=element14, ComponentLink13Description=http://sigma.octopart.com:80/rohs_statement/Yageo-company-2.pdf?src-supplier=Compliance+Statements, ComponentLink13URL=http://sigma.octopart.com:80/rohs_statement/Yageo-company-2.pdf?src-supplier=Compliance+Statements, ComponentLink14Description=http://sigma.octopart.com:80/conflict_mineral_statement/Yageo-company-3.pdf?src-supplier=Compliance+Statements, ComponentLink14URL=http://sigma.octopart.com:80/conflict_mineral_statement/Yageo-company-3.pdf?src-supplier=Compliance+Statements, Composition="Thick Film", Depth=500µm, Features="Moisture Resistant", Height=350µm, Lead Free="Lead Free", Length=1mm, Lifecycle Status=Production, Manufacturer Part Number=RC0402JR-0710KL, Military Standard=Not, Mounting Technology="Surface Mount", Number of Terminals=2, Number of Terminations=2, Packaging="Tape & Reel", Pins=2, Power Rating=62.5mW, Pricing="1=0.1, 10=0.006, 25=0.0056, 50=0.0052, 100=0.0046, 250=0.00416, 500=0.00284 (USD)", REACH SVHC=Yes, RoHS=Compliant, Schedule B="8533210045, 8533210045|8533210045, 8533210045|8533210045|8533210045, 8533210045|8533210045|8533210045|8533210045", Stock=11539169, Supplier=DigiKey, Termination=SMD/SMT, Voltage Rating (AC)=50V, Voltage Rating (DC)=50V, Width=500µm, Working Voltage=50V
R5 R6: library part RC0402FR-075K1L, "RES 5.1K OHM 1% 1/16W 0402", Case Code (Imperial)=0402, LCSC part number=C105872, Manufacturer="Yageo Group", Max Operating Temperature=155°C, Max Power Dissipation=63mW, Min Operating Temperature=-55°C, Power Dissipation=62.5mW, Supplier Part Number=311-5.10KLRCT-ND, Temperature Coefficient=100ppm/°C, Tolerance=1%, Voltage Rating=50V, Case/Package=0402, Category="Chip SMD Resistors", China RoHS=Non-Compliant, ComponentLink1Description=https://datasheet.octopart.com:443/RC0402FR-075K1L-Yageo-datasheet-175887523.pdf?src-supplier=IHS, ComponentLink1URL=https://datasheet.octopart.com:443/RC0402FR-075K1L-Yageo-datasheet-175887523.pdf?src-supplier=IHS, ComponentLink2Description=https://datasheet.octopart.com:443/RC0402FR-075K1L-Yageo-datasheet-103092701.pdf?src-supplier=Upverter, ComponentLink2URL=https://datasheet.octopart.com:443/RC0402FR-075K1L-Yageo-datasheet-103092701.pdf?src-supplier=Upverter, ComponentLink3Description=https://datasheet.octopart.com:443/RC0402FR-075K1L-Yageo-datasheet-10408619.pdf?src-supplier=Newark, ComponentLink3URL=https://datasheet.octopart.com:443/RC0402FR-075K1L-Yageo-datasheet-10408619.pdf?src-supplier=Newark, ComponentLink4Description=https://datasheet.octopart.com:443/RC0402FR-075K1L-Yageo-datasheet-8324527.pdf?src-supplier=Newark, ComponentLink4URL=https://datasheet.octopart.com:443/RC0402FR-075K1L-Yageo-datasheet-8324527.pdf?src-supplier=Newark, ComponentLink5Description=https://datasheet.octopart.com:443/RC0402FR-075K1L-Yageo-datasheet-62067350.pdf?src-supplier=element14+APAC, ComponentLink5URL=https://datasheet.octopart.com:443/RC0402FR-075K1L-Yageo-datasheet-62067350.pdf?src-supplier=element14+APAC, ComponentLink6Description=https://datasheet.octopart.com:443/RC0402FR-075K1L-Yageo-datasheet-164759695.pdf?src-supplier=Future+Electronics, ComponentLink6URL=https://datasheet.octopart.com:443/RC0402FR-075K1L-Yageo-datasheet-164759695.pdf?src-supplier=Future+Electronics, ComponentLink7Description=https://datasheet.octopart.com:443/RC0402FR-075K1L-Yageo-datasheet-137700087.pdf?src-supplier=Future+Electronics, ComponentLink7URL=https://datasheet.octopart.com:443/RC0402FR-075K1L-Yageo-datasheet-137700087.pdf?src-supplier=Future+Electronics, ComponentLink8Description=https://datasheet.octopart.com:443/RC0402FR-075K1L-Yageo-datasheet-12531192.pdf?src-supplier=Future+Electronics, ComponentLink8URL=https://datasheet.octopart.com:443/RC0402FR-075K1L-Yageo-datasheet-12531192.pdf?src-supplier=Future+Electronics, ComponentLink9Description=https://datasheet.octopart.com:443/RC0402FR-075K1L-Yageo-datasheet-505231.pdf?src-supplier=Future+Electronics, ComponentLink9URL=https://datasheet.octopart.com:443/RC0402FR-075K1L-Yageo-datasheet-505231.pdf?src-supplier=Future+Electronics, ComponentLink10Description=https://datasheet.octopart.com:443/RC0402FR-075K1L-Yageo-datasheet-148775077.pdf?src-supplier=TME, ComponentLink10URL=https://datasheet.octopart.com:443/RC0402FR-075K1L-Yageo-datasheet-148775077.pdf?src-supplier=TME, ComponentLink11Description=https://datasheet.octopart.com/RC0402FR-075K1L-Yageo-datasheet-73766026.pdf, ComponentLink11URL=https://datasheet.octopart.com/RC0402FR-075K1L-Yageo-datasheet-73766026.pdf, ComponentLink12Description=https://datasheet.octopart.com:443/RC0402FR-075K1L-Yageo-datasheet-8329306.pdf?src-supplier=element14, ComponentLink12URL=https://datasheet.octopart.com:443/RC0402FR-075K1L-Yageo-datasheet-8329306.pdf?src-supplier=element14, ComponentLink13Description=http://sigma.octopart.com:80/rohs_statement/Yageo-company-2.pdf?src-supplier=Compliance+Statements, ComponentLink13URL=http://sigma.octopart.com:80/rohs_statement/Yageo-company-2.pdf?src-supplier=Compliance+Statements, ComponentLink14Description=http://sigma.octopart.com:80/conflict_mineral_statement/Yageo-company-3.pdf?src-supplier=Compliance+Statements, ComponentLink14URL=http://sigma.octopart.com:80/conflict_mineral_statement/Yageo-company-3.pdf?src-supplier=Compliance+Statements, Composition="Thick Film", Depth=500µm, Features="Moisture Resistant", Height=350µm, Lead Free="Lead Free", Length=1mm, Lifecycle Status=Production, Manufacturer Part Number=RC0402FR-075K1L, Military Standard=Not, Mounting Technology="Surface Mount", Number of Terminals=2, Number of Terminations=2, Packaging="Cut Tape", Pins=2, Power Rating=63mW, Pricing="1=0.1, 10=0.008, 25=0.0072, 50=0.0062, 100=0.0056, 250=0.00308 (USD)", REACH SVHC=Yes, RoHS=Compliant, Schedule B="8533210045, 8533210045|8533210045, 8533210045|8533210045|8533210045, 8533210045|8533210045|8533210045|8533210045", Stock=251126, Supplier=DigiKey, Termination=SMD/SMT, Voltage Rating (DC)=50V, Width=500µm, Working Voltage=50V
R8: library part AC0402FR-0722K1L, "RES SMD 22.1K OHM 1% 1/16W 0402", Case Code (Imperial)=0402, Case Code (Metric)=1005, LCSC part number=C226356, Manufacturer="Yageo Group", Max Operating Temperature=155°C, Max Power Dissipation=63mW, Min Operating Temperature=-55°C, Power Dissipation=62.5mW, Supplier Part Number=YAG3457CT-ND, Temperature Coefficient=100ppm/°C, Tolerance=1%, Voltage Rating=50V, Case/Package=0402, Category="Chip SMD Resistors", China RoHS=Non-Compliant, ComponentLink1Description=https://datasheet.octopart.com:443/AC0402FR-0722K1L-Yageo-datasheet-182189377.pdf?src-supplier=IHS, ComponentLink1URL=https://datasheet.octopart.com:443/AC0402FR-0722K1L-Yageo-datasheet-182189377.pdf?src-supplier=IHS, ComponentLink2Description=https://datasheet.octopart.com:443/AC0402FR-0722K1L-Yageo-datasheet-83209224.pdf?src-supplier=Upverter, ComponentLink2URL=https://datasheet.octopart.com:443/AC0402FR-0722K1L-Yageo-datasheet-83209224.pdf?src-supplier=Upverter, ComponentLink3Description=https://datasheet.octopart.com:443/AC0402FR-0722K1L-Yageo-datasheet-178509465.pdf?src-supplier=Newark, ComponentLink3URL=https://datasheet.octopart.com:443/AC0402FR-0722K1L-Yageo-datasheet-178509465.pdf?src-supplier=Newark, ComponentLink4Description=https://datasheet.octopart.com:443/AC0402FR-0722K1L-Yageo-datasheet-166720450.pdf?src-supplier=Future+Electronics, ComponentLink4URL=https://datasheet.octopart.com:443/AC0402FR-0722K1L-Yageo-datasheet-166720450.pdf?src-supplier=Future+Electronics, ComponentLink5Description=https://datasheet.octopart.com:443/AC0402FR-0722K1L-Yageo-datasheet-151884373.pdf?src-supplier=Future+Electronics, ComponentLink5URL=https://datasheet.octopart.com:443/AC0402FR-0722K1L-Yageo-datasheet-151884373.pdf?src-supplier=Future+Electronics, ComponentLink6Description=https://datasheet.octopart.com:443/AC0402FR-0722K1L-Yageo-datasheet-137699919.pdf?src-supplier=Future+Electronics, ComponentLink6URL=https://datasheet.octopart.com:443/AC0402FR-0722K1L-Yageo-datasheet-137699919.pdf?src-supplier=Future+Electronics, ComponentLink7Description=https://datasheet.octopart.com:443/AC0402FR-0722K1L-Yageo-datasheet-86786639.pdf?src-supplier=Future+Electronics, ComponentLink7URL=https://datasheet.octopart.com:443/AC0402FR-0722K1L-Yageo-datasheet-86786639.pdf?src-supplier=Future+Electronics, ComponentLink8Description=https://datasheet.octopart.com:443/AC0402FR-0722K1L-Yageo-datasheet-128677973.pdf?src-supplier=X-ON, ComponentLink8URL=https://datasheet.octopart.com:443/AC0402FR-0722K1L-Yageo-datasheet-128677973.pdf?src-supplier=X-ON, ComponentLink9Description=https://datasheet.octopart.com/AC0402FR-0722K1L-Yageo-datasheet-12512238.pdf, ComponentLink9URL=https://datasheet.octopart.com/AC0402FR-0722K1L-Yageo-datasheet-12512238.pdf, ComponentLink10Description=http://sigma.octopart.com:80/rohs_statement/Yageo-company-2.pdf?src-supplier=Compliance+Statements, ComponentLink10URL=http://sigma.octopart.com:80/rohs_statement/Yageo-company-2.pdf?src-supplier=Compliance+Statements, ComponentLink11Description=http://sigma.octopart.com:80/conflict_mineral_statement/Yageo-company-3.pdf?src-supplier=Compliance+Statements, ComponentLink11URL=http://sigma.octopart.com:80/conflict_mineral_statement/Yageo-company-3.pdf?src-supplier=Compliance+Statements, Composition="Thick Film", Features="Automotive AEC-Q200, Moisture Resistant", Height=320µm, Length=990.6µm, Lifecycle Status=Production, Manufacturer Part Number=AC0402FR-0722K1L, Mounting Technology="Surface Mount", Number of Terminals=2, Number of Terminations=2, Packaging="Tape & Reel", Power Rating=62.5mW, Pricing="1=0.1, 10=0.009, 25=0.008, 50=0.0072, 100=0.0066, 250=0.00408, 500=0.00406 (USD)", REACH SVHC=Yes, RoHS=Compliant, Schedule B="8533210045, 8533210045|8533210045|8533210045|8533210045|8533210045", Stock=23159, Supplier=DigiKey, Width=500µm, Working Voltage=50V
R9: library part RC0402JR-072KL, "RES 2K OHM 5% 1/16W 0402", Case Code (Imperial)=0402, LCSC part number=C137887, Manufacturer="Yageo Group", Max Operating Temperature=155°C, Min Operating Temperature=-55°C, Power Dissipation=62.5mW, Supplier Part Number=311-2.0KJRCT-ND, Temperature Coefficient=100ppm/°C, Tolerance=5%, Voltage Rating=50V, Case/Package=0402, Category="Chip SMD Resistors", China RoHS=Non-Compliant, ComponentLink1Description=https://datasheet.octopart.com:443/RC0402JR-072KL-Yageo-datasheet-175887523.pdf?src-supplier=Newark, ComponentLink1URL=https://datasheet.octopart.com:443/RC0402JR-072KL-Yageo-datasheet-175887523.pdf?src-supplier=Newark, ComponentLink2Description=https://datasheet.octopart.com:443/RC0402JR-072KL-Yageo-datasheet-10408619.pdf?src-supplier=Farnell, ComponentLink2URL=https://datasheet.octopart.com:443/RC0402JR-072KL-Yageo-datasheet-10408619.pdf?src-supplier=Farnell, ComponentLink3Description=https://datasheet.octopart.com:443/RC0402JR-072KL-Yageo-datasheet-62067350.pdf?src-supplier=Farnell, ComponentLink3URL=https://datasheet.octopart.com:443/RC0402JR-072KL-Yageo-datasheet-62067350.pdf?src-supplier=Farnell, ComponentLink4Description=https://datasheet.octopart.com:443/RC0402JR-072KL-Yageo-datasheet-164759695.pdf?src-supplier=Future+Electronics, ComponentLink4URL=https://datasheet.octopart.com:443/RC0402JR-072KL-Yageo-datasheet-164759695.pdf?src-supplier=Future+Electronics, ComponentLink5Description=https://datasheet.octopart.com:443/RC0402JR-072KL-Yageo-datasheet-137700087.pdf?src-supplier=Future+Electronics, ComponentLink5URL=https://datasheet.octopart.com:443/RC0402JR-072KL-Yageo-datasheet-137700087.pdf?src-supplier=Future+Electronics, ComponentLink6Description=https://datasheet.octopart.com:443/RC0402JR-072KL-Yageo-datasheet-12531192.pdf?src-supplier=Future+Electronics, ComponentLink6URL=https://datasheet.octopart.com:443/RC0402JR-072KL-Yageo-datasheet-12531192.pdf?src-supplier=Future+Electronics, ComponentLink7Description=https://datasheet.octopart.com:443/RC0402JR-072KL-Yageo-datasheet-505231.pdf?src-supplier=Future+Electronics, ComponentLink7URL=https://datasheet.octopart.com:443/RC0402JR-072KL-Yageo-datasheet-505231.pdf?src-supplier=Future+Electronics, ComponentLink8Description=https://datasheet.octopart.com/RC0402JR-072KL-Yageo-datasheet-73766026.pdf, ComponentLink8URL=https://datasheet.octopart.com/RC0402JR-072KL-Yageo-datasheet-73766026.pdf, ComponentLink9Description=https://datasheet.octopart.com:443/RC0402JR-072KL-Yageo-datasheet-8329306.pdf?src-supplier=element14, ComponentLink9URL=https://datasheet.octopart.com:443/RC0402JR-072KL-Yageo-datasheet-8329306.pdf?src-supplier=element14, ComponentLink10Description=https://datasheet.octopart.com:443/RC0402JR-072KL-Yageo-datasheet-8324527.pdf?src-supplier=TME, ComponentLink10URL=https://datasheet.octopart.com:443/RC0402JR-072KL-Yageo-datasheet-8324527.pdf?src-supplier=TME, ComponentLink11Description=http://sigma.octopart.com:80/rohs_statement/Yageo-company-2.pdf?src-supplier=Compliance+Statements, ComponentLink11URL=http://sigma.octopart.com:80/rohs_statement/Yageo-company-2.pdf?src-supplier=Compliance+Statements, ComponentLink12Description=http://sigma.octopart.com:80/conflict_mineral_statement/Yageo-company-3.pdf?src-supplier=Compliance+Statements, ComponentLink12URL=http://sigma.octopart.com:80/conflict_mineral_statement/Yageo-company-3.pdf?src-supplier=Compliance+Statements, Composition="Thick Film", Contact Plating=Tin, Depth=500µm, Height=350µm, Lead Free="Lead Free", Length=1mm, Lifecycle Status=Production, Manufacturer Part Number=RC0402JR-072KL, Military Standard=Not, Mounting Technology="Surface Mount", Number of Terminals=2, Packaging="Tape & Reel", Pins=2, Power Rating=62.5mW, Pricing="1=0.1, 10=0.006, 25=0.0056, 50=0.0052, 100=0.0046, 250=0.00416, 500=0.00284 (USD)", Radiation Hardening=No, REACH SVHC=Yes, RoHS=Compliant, Schedule B="8533210045, 8533210045|8533210045|8533210045|8533210045|8533210045", Stock=102655, Supplier=DigiKey, Termination=SMD/SMT, Voltage Rating (DC)=50V, Width=500µm, Working Voltage=50V